# Allegro board USB2RS232_PCB_V1.0_20241208.brd
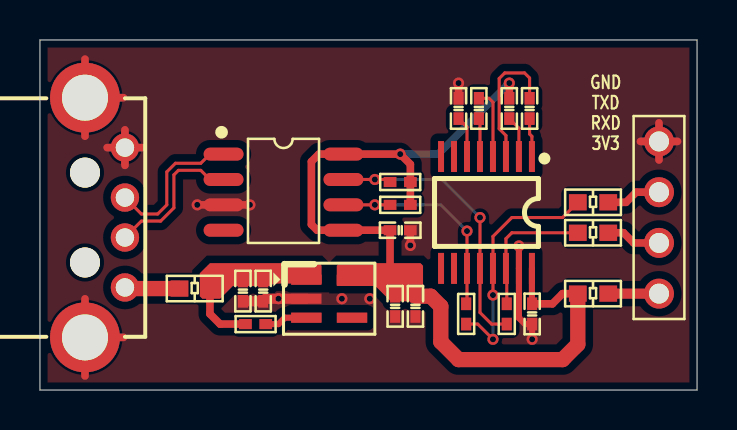
[diagram p0: board, top side]
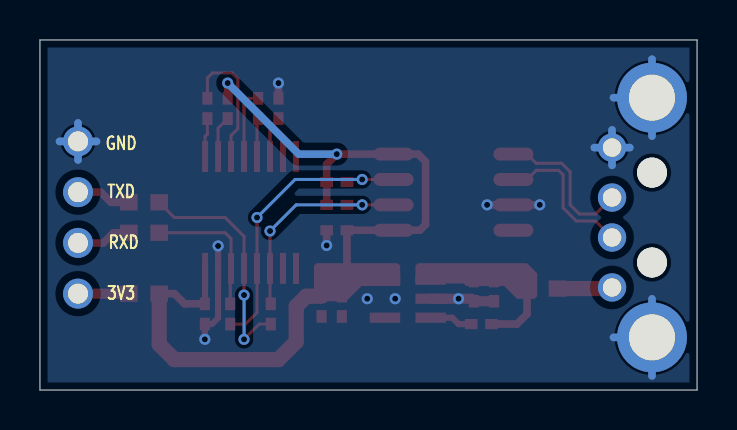
[diagram p1: board, bottom side, seen from below]

Outline 32.89 x 17.53 mm; copper layers: TOP, BOTTOM. Coordinates in mm from the lower left corner of the outline.
Outline path: 0,17.53 32.89,17.53 32.89,0 0,0 0,17.53

## Design rules (mm)
constraint set DEFAULT: min track width 0.152
net group USB_90OHM: nets USB_D+ USB_D-
net group POWER_CLASS: nets N05221 USB_VBUS VCC_3V3 VIN

## Placement (name value [footprint] x y rotation side)
C1001  1uF/25V  [C0402]  17.78 4.19 90 top
C1002  0.1uF/25V  [C0402]  18.8 4.19 90 top
C1003  1uF/25V  [C0402]  10.16 4.95 90 top
C1004  0.1uF/25V  [C0402]  11.18 4.95 90 top
C1005  0.1uF/25V  [C0402]  24.51 14.1 270 top
C1006  0.1uF/25V  [C0402]  21.97 14.1 90 top
C1007  0.1uF/25V  [C0402]  24.64 3.81 90 top
C1008  0.1uF/25V  [C0402]  23.49 14.1 270 top
C1009  0.1uF/25V  [C0402]  20.95 14.1 270 top
C1010  0.1uF/25V  [C0402]  18.03 8 180 top
J1001  CON4  [SIP-4]  30.99 4.83 90 top
R1001  0R  [R0603]  7.75 5.08 0 top
R1002  10K  [R0402]  10.79 3.3 0 top
R1003  0R  [R0603]  27.69 4.83 0 top
R1004  10K/NC  [R0402]  18.03 10.41 180 top
R1005  100R/NC  [R0402]  23.37 3.81 270 top
R1006  10K  [R0402]  18.03 9.27 180 top
R1007  100R/NC  [R0402]  21.34 3.81 90 top
R1008  100R  [R0603]  27.69 7.87 0 top
R1009  100R  [R0603]  27.69 9.4 0 top
U1001  XC6228D332VR-G  [SOT23-5]  14.48 4.57 270 top
U1002  CH340N  [SOIC-8]  12.19 9.91 0 top
U1003  SP3232EEY  [TSSOP16]  22.35 8.89 180 top
USB1001  USB_A  [USB-A-DIP]  4.25 8.64 270 top

## Library data of the parts
C1001-C1010 = CAP NP
J1001 = CON4
R1001-R1009 = R
U1001 = XC6228D332VR-G
U1002 = CH340N
U1003 = SP3232EEY
USB1001 = USB_A

## Footprints (pads in the part's own frame, mm; a bottom-side part is the same pattern mirrored in y, then rotated)
C0402
  rect 0.635x0.508 smd: 1(-0.508,0) 2(0.508,0)
R0402
  rect 0.635x0.508 smd: 1(-0.508,0) 2(0.508,0)
R0603
  rect 0.889x0.813 smd: 1(-0.762,0) 2(0.762,0)
SIP-4
  round 1.5 hole 1: 1(0,0) 2(2.54,0) 3(5.08,0) 4(7.62,0)
SOIC-8
  oval 2x0.65 smd: 1(-3,1.905) 2(-3,0.635) 3(-3,-0.635) 4(-3,-1.905) 5(3,-1.905) 6(3,-0.635) 7(3,0.635) 8(3,1.905)
SOT23-5
  rect 0.508x1.524 smd: 1(-0.95,-1.143) 2(0,-1.143) 3(0.95,-1.143) 4(0.95,1.143) 5(-0.95,1.143)
TSSOP16
  rect 0.3x1.55 smd: 1(-2.275,-2.8) 2(-1.625,-2.8) 3(-0.975,-2.8) 4(-0.325,-2.8) 5(0.325,-2.8) 6(0.975,-2.8) 7(1.625,-2.8) 8(2.275,-2.8) 9(2.275,2.8) 10(1.625,2.8) 11(0.975,2.8) 12(0.325,2.8) 13(-0.325,2.8) 14(-0.975,2.8) 15(-1.625,2.8) 16(-2.275,2.8)
USB-A-DIP
  round 1.5 hole 1.5 unplated: (-2.25,-2) (2.25,-2)
  round 1.42 hole 0.92: 1(3.5,0) 2(1,0) 3(-1,0) 4(-3.5,0)
  round 3.5 hole 2.3: 5(-6,-2) 6(6,-2)

## Nets
GND: C1001.1 C1002.1 C1003.1 C1004.1 C1007.1 C1009.1 C1010.1 J1001.4 U1001.2(VSS) U1002.3 U1003.15 USB1001.4 USB1001.5 USB1001.6
VCC_3V3: C1001.2 C1002.2 C1007.2 C1008.1 C1010.2 R1003.1 R1004.1 R1006.1 U1001.5 U1002.5(VCC) U1002.8 U1003.16(VCC)
VIN: C1003.2 C1004.2 R1001.2 R1002.1 U1001.1
RS232_RXD1: R1005.1 R1008.1 U1003.14
RS232_TXD1: R1007.1 R1009.1 U1003.13
TTL_RXD1: R1004.2 R1005.2 U1002.7 U1003.12
TTL_TXD1: R1006.2 R1007.2 U1002.6 U1003.11
USB_D+: U1002.1 USB1001.3
USB_D-: U1002.2 USB1001.2
USB_VBUS: R1001.1 USB1001.1(VCC)
N00381: C1005.2 U1003.1
N00385: C1005.1 U1003.3
N00436: C1006.2 U1003.4
N00440: C1006.1 U1003.5
N00922: R1002.2 U1001.3
N01793: C1009.2 U1003.6
N03304: C1008.2 U1003.2
N05221: J1001.1 R1003.2
N05433: J1001.2 R1008.2
N05437: J1001.3 R1009.2

Pads without a net: U1001 4; U1002 4; U1003 7 8 9 10

## Via types
v1: diameter 0.559, hole 0.305, TOP to BOTTOM, 17 vias

## Routing (per net, layer and track width the routed paths; a pad name or vN(x,y) marks a point on that pad's centre or on a via; arc(x,y) is an arc through that point)
GND: length 50.2
  TOP w0.305: v1(23.98,7.21) U1003.15 23.98,3.61 24.28,3.3 C1007.1 v1(24.64,2.54)
  TOP w0.381: 4.25,11.25 USB1001.4 ; USB1001.4 4.25,13.02 ; USB1001.4 3.37,12.14 ; USB1001.4 5.14,12.14 ; 30.99,11.52 J1001.4 ; J1001.4 30.99,13.37 ; J1001.4 31.92,12.45 ; J1001.4 30.06,12.45 ; v1(10.51,9.27) U1002.3 v1(7.87,9.27) ; C1009.1 v1(20.95,15.37) ; USB1001.6 2.25,4.56 ; USB1001.6 2.25,0.71 ; USB1001.6 4.18,2.64 ; 2.25,12.71 USB1001.5 ; USB1001.5 2.25,16.56 ; USB1001.5 4.18,14.64 ; C1010.1 v1(18.54,7.24)
  TOP w0.508: U1001.2 v1(11.94,4.57) 11.3,4.57 C1004.1 C1003.1
  BOTTOM w0.381: 3.37,12.14 USB1001.4 ; USB1001.4 4.25,13.02 ; USB1001.4 5.14,12.14 ; USB1001.4 4.25,11.25 ; USB1001.5 2.25,16.56 ; USB1001.5 2.25,12.71 ; USB1001.5 4.18,14.64 ; USB1001.6 2.25,4.56 ; USB1001.6 2.25,0.71 ; USB1001.6 4.18,2.64 ; 30.06,12.45 J1001.4 ; J1001.4 30.99,13.37 ; J1001.4 31.92,12.45 ; J1001.4 30.99,11.52
  vias: v1(15.11,4.57) v1(16.51,4.57)
VCC_3V3: length 41.8
  TOP w0.305: C1007.2 24.63,4.33 U1003.16
  TOP w0.381: C1008.1 v1(23.49,15.37) ; R1003.1 26.16,4.83 25.65,4.32 C1007.2 ; R1006.1 R1004.1 18.54,11.3 v1(18.03,11.81) U1002.8 13.96,11.81 13.59,11.44 13.59,8.29 13.87,8 U1002.5 C1010.2 17.53,6.1
  TOP w0.762: R1003.1 26.92,2.29 26.16,1.52 20.95,1.52 20.07,2.41 20.07,4.19 19.56,4.7 C1002.2
  BOTTOM w0.381: v1(18.03,11.81) 19.94,11.81 v1(23.49,15.37)
VIN: length 3
  TOP w0.381: R1002.1 9.02,3.3 8.51,3.81 8.51,4.83
RS232_RXD1: length 7
  TOP w0.152: R1008.1 23.62,7.87 23.33,7.58 U1003.14 23.37,6.05 R1005.1
RS232_TXD1: length 11.8
  TOP w0.152: R1007.1 21.91,3.3 v1(22.68,2.54) ; v1(22.68,4.76) U1003.13 22.68,7.69 23.62,8.64 26.16,8.64 R1009.1
  BOTTOM w0.152: v1(22.68,4.76) v1(22.68,2.54)
TTL_RXD1: length 14.8
  TOP w0.152: v1(22.03,8.64) U1003.12 22.03,3.88 22.61,3.3 R1005.2 ; R1004.2 17.4,10.54 v1(16.76,10.54) U1002.7
  BOTTOM w0.152: v1(22.03,8.64) 20.12,10.54 v1(16.76,10.54)
TTL_TXD1: length 11.1
  TOP w0.152: R1007.2 21.38,4.36 U1003.11 v1(21.38,7.96) ; U1002.6 v1(16.76,9.27) R1006.2
  BOTTOM w0.152: v1(21.38,7.96) 20.07,9.27 v1(16.76,9.27)
USB_D+: length 7.5
  TOP w0.152: USB1001.3 5.08,8.81 5.89,8.81 6.35,9.27 6.35,10.92 6.78,11.35 8.05,11.35 8.51,11.81 U1002.1
USB_D-: length 7.5
  TOP w0.152: USB1001.2 5.08,8.46 6.04,8.46 6.71,9.12 6.71,10.77 6.93,11 8.05,11 8.51,10.54 U1002.2
USB_VBUS: length 2.8
  TOP w0.762: R1001.1 4.31,5.08 USB1001.1
N00381: length 1.9
  TOP w0.152: U1003.1 24.63,12.7 24.51,12.82 C1005.2
N00385: length 6.8
  TOP w0.152: C1005.1 24.51,15.62 24.26,15.88 23.27,15.88 22.99,15.6 22.99,13.08 23.33,12.74 U1003.3
N00436: length 3.5
  TOP w0.152: C1006.2 22.48,14.61 22.68,14.41 U1003.4
N00440: length 1.9
  TOP w0.152: C1006.1 22.03,13.53 U1003.5
N00922: length 2.2
  TOP w0.305: U1001.3 12.26,3.62 11.94,3.3 R1002.2
N01793: length 2.1
  TOP w0.152: C1009.2 21.38,13.17 U1003.6
N03304: length 2.1
  TOP w0.152: C1008.2 23.98,13.11 U1003.2
N05221: length 2.5
  TOP w0.508: R1003.2 J1001.1
N05433: length 2.8
  TOP w0.381: R1008.2 29.21,7.87 29.72,7.37 J1001.2
N05437: length 2.8
  TOP w0.381: R1009.2 29.34,9.4 29.84,9.91 30.99,9.91

## Copper pours and planes (outline as drawn; the poured copper is in the pictures)
GND on TOP: 12.57,4.83 16.64,4.83 17.53,3.94 19.18,3.94 19.18,2.92 19.05,2.79 16.76,2.79 16.64,2.92 16.64,3.94 16.26,4.32 12.57,4.32
GND on TOP: 0.38,17.14 32.51,17.14 32.51,0.38 0.38,0.38 ; 1 cut-out
GND on BOTTOM: 0.38,17.14 32.51,17.14 32.51,0.38 0.38,0.38
VCC_3V3 on TOP (solid shape): 19.18,6.22 19.18,4.45 17.56,4.45 16.79,5.21 14.86,5.21 14.86,6.22 14.99,6.35 19.05,6.35
VIN on TOP (solid shape): 14.1,6.22 14.1,5.33 11.68,5.33 11.56,5.21 9.65,5.21 9.02,4.57 8.13,4.57 8,4.7 8,5.84 8.51,6.35 13.97,6.35

## Text on the board
Ref Des/Silkscreen Bottom: RXD | GND | TXD | 3V3
Ref Des/Silkscreen Top: GND | TXD | RXD | 3V3
User.8: FIGURE | FINISHED_SIZE | 12.0 | 36.22 | 39.37 | 90.551 | 59.055 | DRILL CHART: TOP to BOTTOM | ALL UNITS ARE IN MILS | PLATED | NON-PLATED | QTY | 17 | 4 | 2
